# Altium PCB 388D_Control_v1_PCB1_temp.PcbDoc (part 4 of 4)
Units mil, origin at the board's own origin, x right, y up, seen from the top; angles counter-clockwise.
Board outline 4500 x 3200 mil, 6 copper layers (Top Layer, Singal Layer 2, Signal layer 3, Signal Layer 4, Signal Layer 5, Bottom Layer), stack 63.307 mil thick; 386 components, 377 nets, 1673 pads, 351 vias.
Unrouted connection lines stored in the file: 1151.
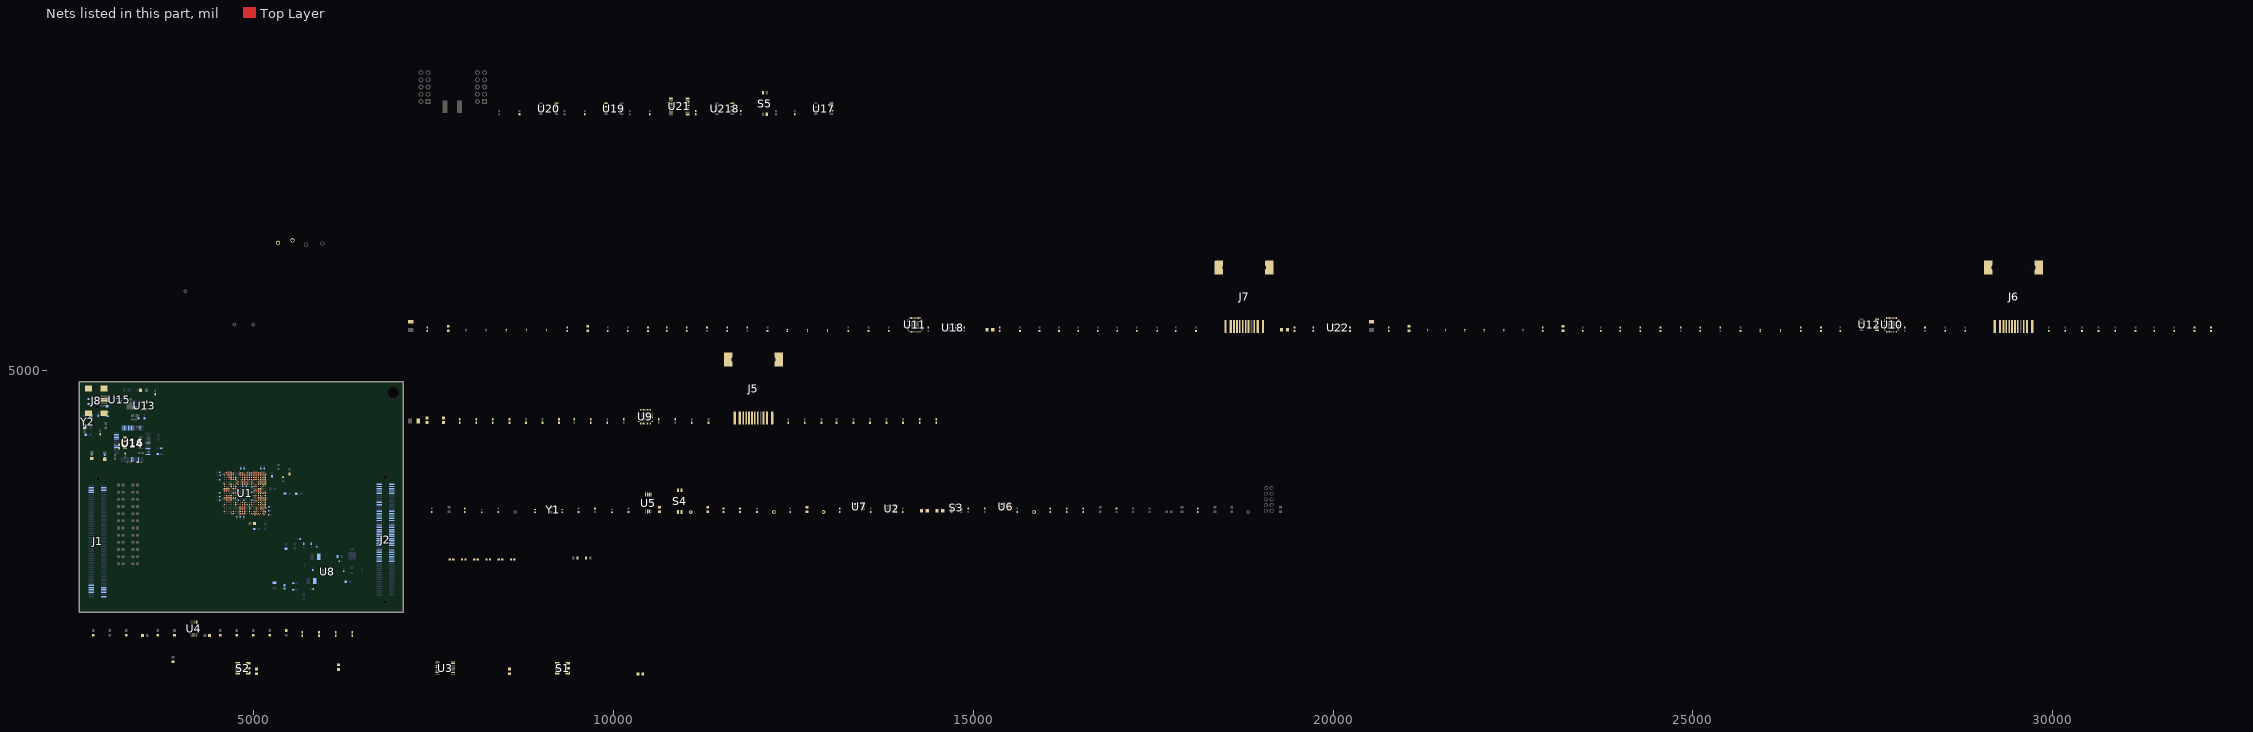
[diagram p3: the nets of this part, all layers, seen from the top]

## Via types
v1: diameter 18, hole 8, Top Layer to Bottom Layer, tented both sides, 334 vias
v2: diameter 19.68, hole 7.87, Top Layer to Bottom Layer, tented both sides, 15 vias
v3: diameter 22, hole 8, Top Layer to Bottom Layer, tented both sides, 1 vias
v4: diameter 18/18/18/18/18/18 (per signal layer), hole 8, Top Layer to Bottom Layer, tented both sides, 1 vias

## Nets (pads, with @x,y where several pads share a name; then routed paths per layer and width w, separated by ;. In a path a pad name is that pad's centre, name@x,y a point inside that pad or via, vN(x,y) a via of type N, cw(c..) or ccw(c..) an arc to the next point about the centre after c; other vN are vias at no path point) (continued)
MCU_GPIO41: J1.91 U1.U17 | length 22.3
  Top Layer w6.25: U1.U17@5098.46,3074.88 v1(5114.21,3059.13)
MCU_GPIO42: U1.D19 | length 22.3
  Top Layer w6.25: U1.D19@5161.46,3484.33 v1(5177.2,3500.08)
MCU_GPIO43: U1.C19 | length 22.3
  Top Layer w6.25: U1.C19@5161.46,3515.83 v1(5177.2,3531.57)
MCU_GPIO44: U1.K18 U9.2 | length 22.3
  Top Layer w6.25: U1.K18@5129.96,3295.35 v1(5145.71,3311.1)
MCU_GPIO45: J1.92 U1.K19 | length 22.3
  Top Layer w6.25: U1.K19@5161.46,3295.35 v1(5177.2,3311.1)
MCU_GPIO46: U1.E19 | length 22.3
  Top Layer w6.25: U1.E19@5161.46,3452.83 v1(5177.2,3468.58)
MCU_GPIO47: U1.E18 | length 22.3
  Top Layer w6.25: U1.E18@5129.96,3452.83 v1(5145.71,3468.58)
MCU_GPIO48: J1.99 U1.R16 | length 22.3
  Top Layer w6.25: U1.R16@5066.97,3137.87 v1(5082.72,3122.13)
MCU_GPIO49: J2.1 U1.R17 | length 22.3
  Top Layer w6.25: U1.R17@5098.46,3137.87 v1(5114.21,3122.13)
MCU_GPIO50: J2.3 U1.R18 | length 22.3
  Top Layer w6.25: U1.R18@5129.96,3137.87 v1(5145.71,3122.13)
MCU_GPIO51: J2.5 U1.R19 | length 22.3
  Top Layer w6.25: U1.R19@5161.46,3137.87 v1(5177.2,3122.13)
MCU_GPIO52: J2.7 U1.P16 | length 22.3
  Top Layer w6.25: U1.P16@5066.97,3169.37 v1(5082.72,3153.62)
MCU_GPIO53: J2.9 U1.P17 | length 22.3
  Top Layer w6.25: U1.P17@5098.46,3169.37 v1(5114.21,3153.62)
MCU_GPIO55: J2.2 U1.P19 | length 22.3
  Top Layer w6.25: U1.P19@5161.46,3169.37 v1(5177.2,3153.62)
MCU_GPIO56: J2.4 U1.N16 | length 22.3
  Top Layer w6.25: U1.N16@5066.97,3200.87 v1(5082.72,3185.12)
MCU_GPIO57: J2.6 U1.N18 | length 22.3
  Top Layer w6.25: U1.N18@5129.96,3200.87 v1(5145.71,3185.12)
MCU_GPIO58: J2.8 U1.N17 | length 22.3
  Top Layer w6.25: U1.N17@5098.46,3200.87 v1(5114.21,3185.12)
MCU_GPIO59: J2.10 R3.1
MCU_GPIO60: J2.25 U1.M17 | length 22.3
  Top Layer w6.25: U1.M17@5098.46,3232.36 v1(5114.21,3216.61)
MCU_GPIO61: J2.26 R4.1
MCU_GPIO62: J2.27 U1.J17 | length 22.3
  Top Layer w6.25: U1.J17@5098.46,3326.85 v1(5114.21,3342.6)
MCU_GPIO63: J2.28 U1.J16 | length 22.3
  Top Layer w6.25: U1.J16@5066.97,3326.85 v1(5082.72,3342.6)
MCU_GPIO64: J2.29 R5.1
MCU_GPIO65: J2.30 U1.K16 | length 22.3
  Top Layer w6.25: U1.K16@5066.97,3295.35 v1(5082.72,3311.1)
MCU_GPIO66: J2.31 R6.1
MCU_GPIO67: J2.32 U1.B19 | length 22.3
  Top Layer w6.25: U1.B19@5161.46,3547.32 v1(5177.2,3563.07)
MCU_GPIO68: J2.33 U1.C18 | length 22.3
  Top Layer w6.25: U1.C18@5129.96,3515.83 v1(5145.71,3531.57)
MCU_GPIO69: J2.34 U1.B18 | length 22.3
  Top Layer w6.25: U1.B18@5129.96,3547.32 v1(5145.71,3563.07)
MCU_GPIO70: J2.37 R7.1
MCU_GPIO71: J2.38 U1.B17 | length 22.3
  Top Layer w6.25: U1.B17@5098.46,3547.32 v1(5114.21,3563.07)
MCU_GPIO72: J2.39 R8.1 R74.2 S4.2
MCU_GPIO73: J2.40 U1.A16 | length 22.3
  Top Layer w6.25: U1.A16@5066.97,3578.82 v1(5082.72,3594.57)
MCU_GPIO74: J2.41 U1.C17 | length 22.3
  Top Layer w6.25: U1.C17@5098.46,3515.83 v1(5114.21,3531.57)
MCU_GPIO75: U1.D16 U9.4 | length 22.3
  Top Layer w6.25: U1.D16@5066.97,3484.33 v1(5082.72,3500.08)
MCU_GPIO76: J2.43 U1.C16 | length 22.3
  Top Layer w6.25: U1.C16@5066.97,3515.83 v1(5082.72,3531.57)
MCU_GPIO77: J2.44 U1.A15 | length 22.3
  Top Layer w6.25: U1.A15@5035.47,3578.82 v1(5051.22,3594.57)
MCU_GPIO78: J2.45 U1.B15 | length 22.3
  Top Layer w6.25: U1.B15@5035.47,3547.32 v1(5051.22,3563.07)
MCU_GPIO79: J2.46 U1.C15 | length 22.3
  Top Layer w6.25: U1.C15@5035.47,3515.83 v1(5051.22,3531.57)
MCU_GPIO80: J2.47 U1.D15 | length 22.3
  Top Layer w6.25: U1.D15@5035.47,3484.33 v1(5051.22,3500.08)
MCU_GPIO81: J2.48 U1.A14 | length 22.3
  Top Layer w6.25: U1.A14@5003.98,3578.82 v1(5019.72,3594.57)
MCU_GPIO82: J2.49 U1.B14 | length 22.3
  Top Layer w6.25: U1.B14@5003.98,3547.32 v1(5019.72,3563.07)
MCU_GPIO83: J2.50 U1.C14 | length 22.3
  Top Layer w6.25: U1.C14@5003.98,3515.83 v1(5019.72,3531.57)
MCU_GPIO84: J2.51 R75.1 S4.1 U1.A11 | length 22.3
  Top Layer w6.25: U1.A11@4909.49,3578.82 v1(4925.24,3594.57)
MCU_GPIO85: J2.52 U1.B11 | length 22.3
  Top Layer w6.25: U1.B11@4909.49,3547.32 v1(4925.24,3563.07)
MCU_GPIO86: J2.53 U1.C11 | length 22.3
  Top Layer w6.25: U1.C11@4909.49,3515.83 v1(4925.24,3531.57)
MCU_GPIO87: J2.54 U1.D11 | length 22.3
  Top Layer w6.25: U1.D11@4909.49,3484.33 v1(4925.24,3500.08)
MCU_GPIO88: J2.55 U1.C6 | length 22.3
  Top Layer w6.25: v1(4736.26,3531.57) U1.C6@4752.01,3515.83
MCU_GPIO89: J2.56 U1.D6 | length 22.3
  Top Layer w6.25: v1(4736.26,3500.08) U1.D6@4752.01,3484.33
MCU_GPIO90: J2.59 U1.A5 | length 22.3
  Top Layer w6.25: v1(4704.76,3594.57) U1.A5@4720.51,3578.82
MCU_GPIO91: J2.60 U1.B5 | length 22.3
  Top Layer w6.25: v1(4704.76,3563.07) U1.B5@4720.51,3547.32
MCU_GPIO92: J2.61 U1.A4 | length 22.3
  Top Layer w6.25: v1(4673.27,3594.57) U1.A4@4689.02,3578.82
MCU_GPIO93: J2.62 U1.B4 | length 22.3
  Top Layer w6.25: v1(4673.27,3563.07) U1.B4@4689.02,3547.32
MCU_GPIO94: J2.63 U1.A3 | length 22.3
  Top Layer w6.25: v1(4641.77,3594.57) U1.A3@4657.52,3578.82
MCU_GPIO95: J2.68 U1.B3 | length 22.3
  Top Layer w6.25: v1(4641.77,3563.07) U1.B3@4657.52,3547.32
MCU_GPIO96: J1.93 U1.C3 | length 22.3
  Top Layer w6.25: v1(4641.77,3531.57) U1.C3@4657.52,3515.83
MCU_GPIO97: J1.94 U1.A2 | length 22.3
  Top Layer w6.25: v1(4610.28,3594.57) U1.A2@4626.02,3578.82
MCU_GPIO98: J1.95 U1.F1 | length 22.3
  Top Layer w6.25: v1(4578.78,3437.09) U1.F1@4594.53,3421.34
MCU_GPIO99: J1.96 U1.G1 | length 24.8
  Top Layer w6.25: v1@4576.99,3407.38 v1(4578.78,3405.59) U1.G1@4594.53,3389.84
MCU_GPIO100: U1.H1 | length 22.3
  Top Layer w6.25: v1(4578.78,3374.09) U1.H1@4594.53,3358.35
MCU_GPIO101: U1.H2 | length 22.3
  Top Layer w6.25: v1(4610.28,3374.09) U1.H2@4626.02,3358.35
MCU_GPIO102: U1.H3 | length 22.3
  Top Layer w6.25: v1(4641.77,3374.09) U1.H3@4657.52,3358.35
MCU_GPIO103: U1.J1 | length 22.3
  Top Layer w6.25: v1(4578.78,3342.6) U1.J1@4594.53,3326.85
MCU_GPIO104: J2.69 U1.J2 | length 22.3
  Top Layer w6.25: v1(4610.28,3342.6) U1.J2@4626.02,3326.85
MCU_GPIO105: U1.J3 U9.20 | length 22.3
  Top Layer w6.25: v1(4641.77,3342.6) U1.J3@4657.52,3326.85
MCU_GPIO106: R92.2 U1.L2 U9.19 | length 22.3
  Top Layer w6.25: v1(4610.28,3248.11) U1.L2@4626.02,3263.86
MCU_GPIO107: J2.70 R72.2 U1.L3 | length 22.3
  Top Layer w6.25: v1(4641.77,3248.11) U1.L3@4657.52,3263.86
MCU_GPIO108: R93.1 U1.L4 U9.8 | length 22.3
  Top Layer w6.25: v1(4673.27,3248.11) U1.L4@4689.02,3263.86
MCU_GPIO109: U1.N2 U9.27 | length 22.3
  Top Layer w6.25: v1(4610.28,3185.12) U1.N2@4626.02,3200.87
MCU_GPIO110: U1.M2 U9.29 | length 22.3
  Top Layer w6.25: v1(4610.28,3216.61) U1.M2@4626.02,3232.36
MCU_GPIO111: U1.M4 U9.25 | length 22.3
  Top Layer w6.25: v1(4673.27,3216.61) U1.M4@4689.02,3232.36
MCU_GPIO112: U1.M3 U9.26 | length 22.3
  Top Layer w6.25: v1(4641.77,3216.61) U1.M3@4657.52,3232.36
MCU_GPIO113: U1.N4 U9.28 | length 22.3
  Top Layer w6.25: v1(4673.27,3185.12) U1.N4@4689.02,3200.87
MCU_GPIO114: U1.N3 U9.30 | length 22.3
  Top Layer w6.25: v1(4641.77,3185.12) U1.N3@4657.52,3200.87
MCU_GPIO115: U1.V12 U9.31 | length 22.3
  Top Layer w6.25: U1.V12@4940.98,3043.39 v1(4956.73,3027.64)
MCU_GPIO116: U1.W10 U9.32 | length 22.3
  Top Layer w6.25: v1(4862.24,2996.14) U1.W10@4877.99,3011.89
MCU_GPIO117: U1.U12 U9.1 | length 22.3
  Top Layer w6.25: U1.U12@4940.98,3074.88 v1(4956.73,3059.13)
MCU_GPIO118: U1.T12 U9.3 | length 22.3
  Top Layer w6.25: U1.T12@4940.98,3106.38 v1(4956.73,3090.63)
MCU_GPIO119: U1.T15 U9.18 | length 22.3
  Top Layer w6.25: U1.T15@5035.47,3106.38 v1(5051.22,3090.63)
MCU_GPIO120: U1.U15 | length 22.3
  Top Layer w6.25: U1.U15@5035.47,3074.88 v1(5051.22,3059.13)
MCU_GPIO121: U1.W16 | length 22.3
  Top Layer w6.25: U1.W16@5066.97,3011.89 v1(5082.72,2996.14)
MCU_GPIO122: U1.T8 U9.5 | length 22.3
  Top Layer w6.25: v1(4799.25,3090.63) U1.T8@4815,3106.38
MCU_GPIO123: U1.U8 U9.6 | length 22.3
  Top Layer w6.25: v1(4799.25,3059.13) U1.U8@4815,3074.88
MCU_GPIO124: U1.V8 U9.7 | length 22.3
  Top Layer w6.25: v1(4799.25,3027.64) U1.V8@4815,3043.39
MCU_GPIO125: J1.90 U1.T9 | length 22.3
  Top Layer w6.25: v1(4830.75,3090.63) U1.T9@4846.5,3106.38
MCU_GPIO126: J2.42 U1.U9 | length 22.3
  Top Layer w6.25: v1(4830.75,3059.13) U1.U9@4846.5,3074.88
MCU_GPIO127: J2.65 U1.V9 | length 22.3
  Top Layer w6.25: v1(4830.75,3027.64) U1.V9@4846.5,3043.39
MCU_GPIO128: J2.66 U1.W9 | length 22.3
  Top Layer w6.25: v1(4830.75,2996.14) U1.W9@4846.5,3011.89
MCU_GPIO129: U1.T10 U11.3 | length 22.3
  Top Layer w6.25: v1(4862.24,3090.63) U1.T10@4877.99,3106.38
MCU_GPIO130: U1.U10 U11.2 | length 22.3
  Top Layer w6.25: v1(4862.24,3059.13) U1.U10@4877.99,3074.88
MCU_GPIO131: U1.V10 U11.4 | length 22.3
  Top Layer w6.25: v1(4862.24,3027.64) U1.V10@4877.99,3043.39
MCU_GPIO132: U1.W18 U11.5 | length 22.3
  Top Layer w6.25: U1.W18@5129.96,3011.89 v1(5145.71,2996.14)
MCU_GPIO133: J2.64 U1.G18 | length 22.3
  Top Layer w6.25: U1.G18@5129.96,3389.84 v1(5145.71,3405.59)
MCU_GPIO134: U1.V18 U11.6 | length 22.3
  Top Layer w6.25: U1.V18@5129.96,3043.39 v1(5145.71,3027.64)
MCU_GPIO135: U1.U18 U11.7 | length 22.3
  Top Layer w6.25: U1.U18@5129.96,3074.88 v1(5145.71,3059.13)
MCU_GPIO136: R135.2 U1.T17 U11.26 | length 22.3
  Top Layer w6.25: U1.T17@5098.46,3106.38 v1(5114.21,3090.63)
MCU_GPIO137: U1.T18 U11.25 | length 22.3
  Top Layer w6.25: U1.T18@5129.96,3106.38 v1(5145.71,3090.63)
MCU_GPIO138: R127.1 U1.T19 U11.28 | length 22.3
  Top Layer w6.25: U1.T19@5161.46,3106.38 v1(5177.2,3090.63)
MCU_GPIO139: R136.2 U1.N19 U11.30 | length 22.3
  Top Layer w6.25: U1.N19@5161.46,3200.87 v1(5177.2,3185.12)
MCU_GPIO140: R137.2 U1.M19 U11.31 | length 22.3
  Top Layer w6.25: U1.M19@5161.46,3232.36 v1(5177.2,3216.61)
MCU_GPIO141: R138.2 U1.M18 U11.32 | length 22.3
  Top Layer w6.25: U1.M18@5129.96,3232.36 v1(5145.71,3216.61)
MCU_GPIO142: R139.2 U1.L19 U11.1 | length 22.3
  Top Layer w6.25: U1.L19@5161.46,3263.86 v1(5177.2,3248.11)
MCU_GPIO143: J6.11 U1.F18 | length 22.3
  Top Layer w6.25: U1.F18@5129.96,3421.34 v1(5145.71,3437.09)
MCU_GPIO144: J7.11 U1.F17 | length 22.3
  Top Layer w6.25: U1.F17@5098.46,3421.34 v1(5114.21,3437.09)
MCU_GPIO145: R123.1 U1.E17 U22.1 | length 22.3
  Top Layer w6.25: U1.E17@5098.46,3452.83 v1(5114.21,3468.58)
MCU_GPIO146: R124.1 U1.D18 U22.3 | length 22.3
  Top Layer w6.25: U1.D18@5129.96,3484.33 v1(5145.71,3500.08)
MCU_GPIO147: J2.67 U1.D17 | length 22.3
  Top Layer w6.25: U1.D17@5098.46,3484.33 v1(5114.21,3500.08)
MCU_GPIO148: J6.2 R117.1 U1.D14 U10.17 | length 22.3
  Top Layer w6.25: U1.D14@5003.98,3484.33 v1(5019.72,3500.08)
MCU_GPIO149: J7.2 R140.1 U1.A13 U11.17 | length 22.3
  Top Layer w6.25: U1.A13@4972.48,3578.82 v1(4988.23,3594.57)
MCU_GPIO150: R100.1 U1.B13 U12.5 | length 22.3
  Top Layer w6.25: U1.B13@4972.48,3547.32 v1(4988.23,3563.07)
MCU_GPIO151: R101.1 U1.C13 U12.6 | length 22.3
  Top Layer w6.25: U1.C13@4972.48,3515.83 v1(4988.23,3531.57)
MCU_GPIO152: U1.D13 U10.20 U11.20 | length 22.3
  Top Layer w6.25: U1.D13@4972.48,3484.33 v1(4988.23,3500.08)
MCU_GPIO153: R107.2 R132.2 U1.A12 U10.19 U11.19 | length 22.3
  Top Layer w6.25: U1.A12@4940.98,3578.82 v1(4956.73,3594.57)
MCU_GPIO154: U1.B12 | length 22.3
  Top Layer w6.25: U1.B12@4940.98,3547.32 v1(4956.73,3563.07)
MCU_GPIO155: U1.C12 U10.18 U11.18 | length 22.3
  Top Layer w6.25: U1.C12@4940.98,3515.83 v1(4956.73,3531.57)
MCU_GPIO156: U1.D12 U10.3 | length 22.3
  Top Layer w6.25: U1.D12@4940.98,3484.33 v1(4956.73,3500.08)
MCU_GPIO157: U1.B10 U10.2 | length 22.3
  Top Layer w6.25: v1(4862.24,3563.07) U1.B10@4877.99,3547.32
MCU_GPIO158: U1.C10 U10.4 | length 22.3
  Top Layer w6.25: v1(4862.24,3531.57) U1.C10@4877.99,3515.83
MCU_GPIO159: U1.D10 U10.5 | length 22.3
  Top Layer w6.25: v1(4862.24,3500.08) U1.D10@4877.99,3484.33
MCU_GPIO160: U1.B9 U10.6 | length 22.3
  Top Layer w6.25: v1(4830.75,3563.07) U1.B9@4846.5,3547.32
MCU_GPIO161: U1.C9 U10.7 | length 22.3
  Top Layer w6.25: v1(4830.75,3531.57) U1.C9@4846.5,3515.83
MCU_GPIO162: R111.2 U1.D9 U10.26 | length 22.3
  Top Layer w6.25: v1(4830.75,3500.08) U1.D9@4846.5,3484.33
MCU_GPIO163: U1.A8 U10.25 | length 22.3
  Top Layer w6.25: v1(4799.25,3594.57) U1.A8@4815,3578.82
MCU_GPIO164: R102.1 U1.B8 U10.28 | length 22.3
  Top Layer w6.25: v1(4799.25,3563.07) U1.B8@4815,3547.32
MCU_GPIO165: R112.2 U1.C5 U10.30 | length 22.3
  Top Layer w6.25: v1(4704.76,3531.57) U1.C5@4720.51,3515.83
MCU_GPIO166: R113.2 U1.D5 U10.31 | length 22.3
  Top Layer w6.25: v1(4704.76,3500.08) U1.D5@4720.51,3484.33
MCU_GPIO167: R114.2 U1.C4 U10.32 | length 22.3
  Top Layer w6.25: v1(4673.27,3531.57) U1.C4@4689.02,3515.83
MCU_GPIO168: R115.2 U1.D4 U10.1 | length 22.3
  Top Layer w6.25: v1(4673.27,3500.08) U1.D4@4689.02,3484.33
MCU_TCK: J1.5 U1.V15 U21.14 | length 22.3
  Top Layer w6.25: U1.V15@5035.47,3043.39 v1(5051.22,3027.64)
MCU_TDI: J1.8 U1.W13 U21.18 | length 22.3
  Top Layer w6.25: U1.W13@4972.48,3011.89 v1(4988.23,2996.14)
MCU_TDO: J1.6 R59.1 U21.11
MCU_TMS: J1.3 U1.W14 U21.12 | length 22.3
  Top Layer w6.25: U1.W14@5003.98,3011.89 v1(5019.72,2996.14)
MCU_TRSTn: J1.4 R62.2 U1.V14 U21.16 | length 22.3
  Top Layer w6.25: U1.V14@5003.98,3043.39 v1(5019.72,3027.64)
MCU_XRSn: C74.1 J2.20 R68.1 S3.1 TP6.1 U1.F19 U6.1 U7.1 | length 22.3
  Top Layer w6.25: U1.F19@5161.46,3421.34 v1(5177.2,3437.09)
MID_SCI-RX: S5.2 U20.7
MID_TCK: U21.6 U218.7
MID_TDI: U17.7 U21.2
MID_TDO: U19.2 U21.9
MID_TMS: U21.8 U218.6
MID_TRSTn: U17.6 U21.4
NetC26_1: C26.1 R37.2
NetC27_1: C27.1 R38.2
NetC28_1: C28.1 R39.2
NetC29_1: C29.1 R40.2
NetC32_1: C32.1 R41.2 R42.1 R43.1
NetC34_1: C34.1 U4.5
NetC36_2: C36.2 R50.1 R53.2 U8.1
NetC40_2: C40.2 R45.1 U8.9
NetC41_2: C41.2 R46.1 U8.7
NetC76_1: C76.1 R71.1 R72.1 TP7.1 U6.6 U7.6
NetC95_2: C95.2 J5.10 J5.13 J5.14
NetC113_2: C113.2 J6.10 J6.13 J6.14
NetC131_2: C131.2 J7.10 J7.13 J7.14
NetC135_2: C135.2 U13.4
NetC144_1: C144.1 C145.2 L6.1 U14.4
NetC146_1: C146.1 C147.2 L7.1 U14.9
NetC148_2: C148.2 J8.6 J8.7 J8.8 J8.9 R152.1
NetC149_2: C149.2 U14.2 Y2.1
NetC150_2: C150.2 U14.3 Y2.3
NetD3_1: D3.1 U2.6
NetD3_2: D3.2 R66.2
NetD4_1: D4.1 U2.4
NetD4_2: D4.2 R67.2
NetD5_1: D5.1 U22.6
NetD5_2: D5.2 R120.1
NetD6_1: D6.1 U22.4
NetD6_2: D6.2 R122.2
NetD8_2: D8.2 R142.2
NetD9_1: D9.1 R147.2
NetD10_1: D10.1 R148.2
NetJ5_1: J5.1 R97.2
NetJ5_2: J5.2 R95.1 U9.17
NetJ5_11: J5.11 R94.1 U9.24
NetJ5_12: J5.12 R96.2
NetJ6_1: J6.1 R118.2
NetJ6_12: J6.12 R109.2
NetJ7_1: J7.1 R141.2
NetJ7_12: J7.12 R133.2
NetJ8_2: J8.2 U14.7 U15.5
NetJ8_3: J8.3 U14.8 U15.3
NetL1_1: L1.1 U8.6
NetL2_1: L2.1 U8.10
NetLED1_2: LED1.2 R47.1
NetR3_2: R3.2 U1.M16 | length 22.3
  Top Layer w6.25: U1.M16@5066.97,3232.36 v1(5082.72,3216.61)
NetR4_2: R4.2 U1.L16 | length 22.3
  Top Layer w6.25: U1.L16@5066.97,3263.86 v1(5082.72,3248.11)
NetR5_2: R5.2 U1.L17 | length 22.3
  Top Layer w6.25: U1.L17@5098.46,3263.86 v1(5114.21,3248.11)
NetR6_2: R6.2 U1.K17 | length 22.3
  Top Layer w6.25: U1.K17@5098.46,3295.35 v1(5114.21,3311.1)
NetR7_2: R7.2 U1.A17 | length 22.3
  Top Layer w6.25: U1.A17@5098.46,3578.82 v1(5114.21,3594.57)
NetR8_2: R8.2 U1.B16 | length 22.3
  Top Layer w6.25: U1.B16@5066.97,3547.32 v1(5082.72,3563.07)
NetR9_1: R9.1 S1.5
NetR9_2: R9.2 R37.1 U1.V1 | length 22.3
  Top Layer w6.25: v1(4578.78,3027.64) U1.V1@4594.53,3043.39
NetR16_1: R16.1 S1.2
NetR16_2: R16.2 R38.1 U1.W5 | length 22.3
  Top Layer w6.25: v1(4704.76,2996.14) U1.W5@4720.51,3011.89
NetR25_1: R25.1 S2.5
NetR25_2: R25.2 R39.1 U1.R1 | length 22.3
  Top Layer w6.25: v1(4578.78,3122.13) U1.R1@4594.53,3137.87
NetR30_1: R30.1 S2.2
NetR30_2: R30.2 R40.1 U1.V5 | length 22.3
  Top Layer w6.25: v1(4704.76,3027.64) U1.V5@4720.51,3043.39
NetR44_1: R44.1 U8.4
NetR48_1: R48.1 R49.2
NetR49_1: R49.1 R54.2 U8.5
NetR51_1: R51.1 R52.2 U8.2
NetR59_2: R59.2 U1.W15 | length 22.3
  Top Layer w6.25: U1.W15@5035.47,3011.89 v1(5051.22,2996.14)
NetR77_1: R77.1 U5.3
NetR78_1: R78.1 U5.8
NetR79_1: R79.1 S4.3
NetR80_2: R80.2 S4.4
NetR81_1: R81.1 U5.5
NetR82_1: R82.1 Y1.1
NetR83_1: R83.1 U5.7
NetR84_2: R84.2 R86.1 U5.2
NetR89_1: R89.1 U9.16
NetR103_1: R103.1 U10.27
NetR104_1: R104.1 U10.16
NetR108_1: R108.1 U10.8
NetR110_2: R110.2 U10.24
NetR116_2: R116.2 U10.29
NetR125_1: R125.1 U11.27
NetR126_1: R126.1 U11.29
NetR128_1: R128.1 U11.16
NetR131_1: R131.1 U11.8
NetR134_2: R134.2 U11.24
NetR144_2: R144.2 U14.24
NetR145_1: R145.1 U14.28
NetR146_1: R146.1 U14.32
NetR147_1: R147.1 U14.54
NetR148_1: R148.1 U14.55
NetR149_2: R149.2 R150.1 U16.4
NetR150_2: R150.2 U14.61 U16.3
NetR151_2: R151.2 U14.14
NetR153_2: R153.2 U14.60
NetR154_2: R154.2 U14.6
NetR155_2: R155.2 U14.36
NetR156_1: R156.1 S5.4 U21.1 U21.19
NetS1_3: S1.3 U3.6 U3.7
NetS1_6: S1.6 U3.1 U3.3
NetS2_3: S2.3 U3.15 U3.16
NetS2_6: S2.6 U3.10 U3.12
NetU14_40: U14.40 U14.41
NetU14_62: U14.62 U16.2
NetU14_63: U14.63 U16.1
P0_25MHZ_CLK: R73.2 R78.2
P0_PHY_CLK: R73.1 TP8.1 U10.23
P0_RD_N: J6.8 R106.1 U10.9
P0_RD_P: J6.7 R105.1 U10.10
P0_TD_N: J6.4 R99.1 U10.11
P0_TD_P: J6.3 R98.1 U10.12
P1_25MHZ_CLK: R76.2 R81.2
P1_PHY_CLK: R76.1 TP9.1 U11.23
P1_RD_N: J7.8 R130.1 U11.9
P1_RD_P: J7.7 R129.1 U11.10
P1_TD_N: J7.4 R121.1 U11.11
P1_TD_P: J7.3 R119.1 U11.12
RD_N: J5.8 R91.1 U9.9
RD_P: J5.7 R90.1 U9.10
TD_N: J5.4 R88.1 U9.11
TD_P: J5.3 R87.1 U9.12
VDD_1V2: C44.2 C45.2 C46.2 C47.2 C48.2 C49.2 C50.2 C72.2 J2.18 L5.2 R55.2 TP3.1 U1.E9 U1.E11 U1.F9 U1.F11 U1.G14 U1.G15 U1.J14 U1.J15 U1.K5 U1.K6 U1.P10 U1.P13 U1.R10 U1.R13 U7.3 | length 311.8
  Top Layer w10: v1(4704.76,3311.1) U1.K5@4720.51,3295.35 ; v1(4736.26,3311.1) U1.K6@4752.01,3295.35 ; v1(4830.75,3437.09) U1.F9@4846.5,3421.34 ; v1(4830.75,3468.58) U1.E9@4846.5,3452.83 ; v1(4862.24,3122.13) U1.R10@4877.99,3137.87 ; v1(4862.24,3153.62) U1.P10@4877.99,3169.37 ; U1.F11@4909.49,3421.34 v1(4925.24,3437.09) ; U1.E11@4909.49,3452.83 v1(4925.24,3468.58) ; U1.R13@4972.48,3137.87 v1(4988.23,3122.13) ; U1.P13@4972.48,3169.37 v1(4988.23,3153.62) ; U1.J14@5003.98,3326.85 v1(5019.72,3342.6) ; U1.G14@5003.98,3389.84 v1(5019.72,3405.59) ; U1.J15@5035.47,3326.85 v1(5051.22,3342.6) ; U1.G15@5035.47,3389.84 v1(5051.22,3405.59)
VDD_3V3: C43.1 C55.2 C56.2 C57.2 C58.2 C59.2 C60.2 C61.2 C62.2 C63.2 C64.2 C65.2 C66.2 C67.2 C68.2 C69.2 C70.2 C73.1 C75.1 C77.1 C78.1 C79.1 C80.1 C81.1 C82.1 C83.1 C84.1 C85.1 C86.1 C87.1 C88.1 C89.2 C90.2 C91.2 C92.2 C93.1 C94.1 C96.1 C97.1 C98.1 C99.1 C100.1 C101.1 C102.1 C103.1 C104.1 C105.1 C106.2 C107.2 C108.1 C109.2 C110.2 C111.1 C112.1 C114.1 C115.1 C116.1 C117.1 C118.1 C119.1 C120.1 C121.1 C122.1 C123.1 C124.2 C125.2 C126.1 C127.2 C128.2 C129.1 C130.1 C152.1 C153.2 C155.1 C157.1 C159.1 J5.5 J5.6 J6.5 J6.6 J7.5 J7.6 L3.2 R1.2 R2.1 R66.1 R67.1 R68.2 R69.2 R70.2 R71.2 R74.1 R75.2 R84.1 R87.2 R88.2 R90.2 R91.2 R92.1 R93.2 R94.2 R95.2 R96.1 R97.1 R98.2 R99.2 R100.2 R101.2 R102.2 R103.2 R105.2 R106.2 R107.1 R108.2 R109.1 R110.1 R117.2 R118.1 R119.2 R120.2 R121.2 R122.1 R125.2 R126.2 R127.2 R129.2 R130.2 R131.2 R132.1 R133.1 R134.1 R140.2 R141.1 R156.2 TP2.1 U1.A9 U1.A18 U1.B1 U1.E7 U1.E10 U1.E13 U1.E16 U1.F4 U1.F7 U1.F10 U1.F13 U1.F16 U1.G4 U1.G5 U1.G6 U1.H5 U1.H6 U1.H16 U1.H17 U1.L14 U1.L15 U1.M1 U1.M5 U1.M6 U1.N14 U1.N15 U1.P9 U1.R9 U1.R11 U1.R12 U1.V19 U1.W8 U2.5 U5.6 U6.3 U6.4 U6.5 U7.4 U7.5 U9.14 U9.21 U10.14 U10.21 U11.14 U11.21 U12.8 U17.8 U18.5 U19.1 U20.8 U21.20 U218.8 Y1.4 | length 712.7
  Top Layer w6.25: v1(4673.27,3405.59) U1.G4@4689.02,3389.84 ; v1(4673.27,3437.09) U1.F4@4689.02,3421.34
  Top Layer w10: v1(4578.78,3216.61) U1.M1@4594.53,3232.36 ; v1(4578.78,3563.07) U1.B1@4594.53,3547.32 ; v1(4704.76,3216.61) U1.M5@4720.51,3232.36 ; v1(4704.76,3374.09) U1.H5@4720.51,3358.35 ; v1(4704.76,3405.59) U1.G5@4720.51,3389.84 ; v1(4736.26,3216.61) U1.M6@4752.01,3232.36 ; v1(4736.26,3374.09) U1.H6@4752.01,3358.35 ; v1(4736.26,3405.59) U1.G6@4752.01,3389.84 ; v1(4767.76,3437.09) U1.F7@4783.5,3421.34 ; v1(4767.76,3468.58) U1.E7@4783.5,3452.83 ; v1(4799.25,2996.14) U1.W8@4815,3011.89 ; v1(4830.75,3122.13) U1.R9@4846.5,3137.87 ; v1(4830.75,3153.62) U1.P9@4846.5,3169.37 ; v1(4830.75,3594.57) U1.A9@4846.5,3578.82 ; v1(4862.24,3437.09) U1.F10@4877.99,3421.34 ; v1(4862.24,3468.58) U1.E10@4877.99,3452.83 ; U1.R11@4909.49,3137.87 v1(4925.24,3122.13) ; U1.R12@4940.98,3137.87 v1(4956.73,3122.13) ; U1.F13@4972.48,3421.34 v1(4988.23,3437.09) ; U1.E13@4972.48,3452.83 v1(4988.23,3468.58) ; U1.N14@5003.98,3200.87 v1(5019.72,3185.12) ; U1.L14@5003.98,3263.86 v1(5019.72,3248.11) ; U1.N15@5035.47,3200.87 v1(5051.22,3185.12) ; U1.L15@5035.47,3263.86 v1(5051.22,3248.11) ; U1.H16@5066.97,3358.35 v1(5082.72,3374.09) ; U1.F16@5066.97,3421.34 v1(5082.72,3437.09) ; U1.E16@5066.97,3452.83 v1(5082.72,3468.58) ; U1.H17@5098.46,3358.35 v1(5114.21,3374.09) ; U1.V19@5161.46,3043.39 v1(5177.2,3027.64)
  Top Layer w12: U1.A18@5129.96,3578.82 v1(5145.71,3594.57)
VDDA_3V3: C25.2 C30.1 C31.1 C51.2 C52.2 C54.1 L4.2 S1.1 S1.4 S2.1 S2.4 U1.P6 U1.R6 U3.4 U4.2 | length 44.5
  Top Layer w10: v1(4736.26,3122.13) U1.R6@4752.01,3137.87 ; v1(4736.26,3153.62) U1.P6@4752.01,3169.37
  other v3: 4779.58,3268.26
pads on no net: J1. J1.13 J1.16 J1.29 J1.32 J1.41 J1.43 J1.44 J1.66 J2. J2.13 J2.14 J2.15 J2.16 J2.17 J2.36 J2.71 J2.72 J2.73 J2.74 J2.75 J2.76 J2.77 J2.81 J2.82 J2.83 J2.84 J2.85 J2.86 J2.87 J2.88 J2.89 J2.90 J2.91 J2.92 J2.93 J2.94 J2.95 J2.96 J2.97 J2.98 J2.99 J2.100 J3.9 J5.9 J5.ALIGN1 J5.ALIGN2 J6.9 J6.ALIGN1 J6.ALIGN2 J7.9 J7.ALIGN1 J7.ALIGN2 J8.4 J8.ALIGN1 J8.ALIGN2 J9.1 J9.2 J9.3 J9.4 J9.5 J9.6 J9.7 J9.8 J9.9 J9.10 J10.1 J10.2 J10.3 J10.4 J10.5 J10.6 J10.7 J10.8 J10.9 J10.10 U1.H4 U1.J18 U1.J19 U1.V13 U1.W12 U3.8 U3.9 U4.1 U4.3 U4.7 U4.8 U8.V U9.13 U9.15 U9.22 U9.33@10416.06,4331.06 U9.33@10416.06,4388.94 U9.33@10473.94,4331.06 U9.33@10473.94,4388.94 U10.13 U10.15 U10.22 U10.33@27731.06,5606.06 U10.33@27731.06,5663.94 U10.33@27788.94,5606.06 U10.33@27788.94,5663.94 U11.13 U11.15 U11.22 U11.33@14161.06,5606.06 U11.33@14161.06,5663.94 U11.33@14218.94,5606.06 U11.33@14218.94,5663.94 U14.22 U14.23 U14.26 U14.27 U14.29 U14.30 U14.33 U14.34 U14.43 U14.44 U14.45 U14.46 U14.48 U14.52 U14.53 U14.57 U14.58 U14.59 U15.2 U16.7 U18.1 U18.3 U18.4 U18.6 U20.6 U21.3 U21.5 U21.7 U22.2 U22.5
copper on no net:
  other v1: 4893.74,3059.13 5019.72,3279.26 4893.74,3563.07

## Silkscreen, mask and mechanical layers (free items; w line width, h text height)
M1 Board Outline:
  lines w10: 2580,4845 7080,4845 7080,1645 2582.29,1647.29 2580,4845
M2 Board Dimensions:
  rectangle: 2705,5460 3080,5585
  rectangle: 2580,5585 2705,5710
  lines w7: 2580,5585 3580,5585 ; 2705,5460 2705,5710 ; 2830,5460 2830,5710 ; 3080,5460 3080,5710 ; 3330,5460 3330,5710 ; 2580,5460 3580,5460 3580,5710 2580,5710 2580,5460
M9 Title Sheet:
  lines w10: 10895,1005 10995,1005 ; 10995,8975 10995,8995 ; 1005,1005 1005,12095 16495,12095 16495,1005 1005,1005 ; 1205,1205 16295,1205 16295,11895 1205,11895 1205,1205
M11 gerber information:
  lines w10: 1204.5,1206.67 3672.83,1206.67 ; 1204.5,1410 3674.5,1410 3674.5,1208.33 ; 1205,1206.67 1205,1410
  text "LAYER NAME =" at 1268,1278.34 h60

## Dimensions
2580,5460 to 3580,5460 on M2 Board Dimensions
2580,4860 to 7080,4845 on M2 Board Dimensions
2580,1645 to 2565,4845 on M2 Board Dimensions

## Text inside footprints (layer, text, board x,y; h text height)
L3: Mechanical 6 "Land Pattern Adapted for Flow Soldering" at 5509.37,3318.62 h1.97
L4: Mechanical 6 "Land Pattern Adapted for Flow Soldering" at 5081.85,2823.62 h1.97
L5: Mechanical 6 "Land Pattern Adapted for Flow Soldering" at 5523.62,3634.37 h1.97 r270
S4: Mechanical 5 "1" at 10872.76,3090.51 h39.37
S5: Mechanical 5 "1" at 12057.76,8615.51 h39.37
U1: Top Overlay "RefDes" at 4802.99,3270.35 h50; Top Overlay "Designator195" at 4535,3640 h50
U8: Bottom Overlay "RefDes" at 6100,2182.4 h50; Bottom Overlay "Designator355" at 6086,2303.4 h50